# Altium PCB Routed BOARD 3.pcbdoc (part 7 of 7)
Units mil, origin at the board's own origin, x right, y up, seen from the top; angles counter-clockwise.
Board outline 6225 x 7025 mil, 8 copper layers (TopLayer, MidLayer1, MidLayer2, MidLayer3, MidLayer4, MidLayer5, MidLayer6, BottomLayer); 253 components, 548 nets, 2588 pads, 2014 vias.
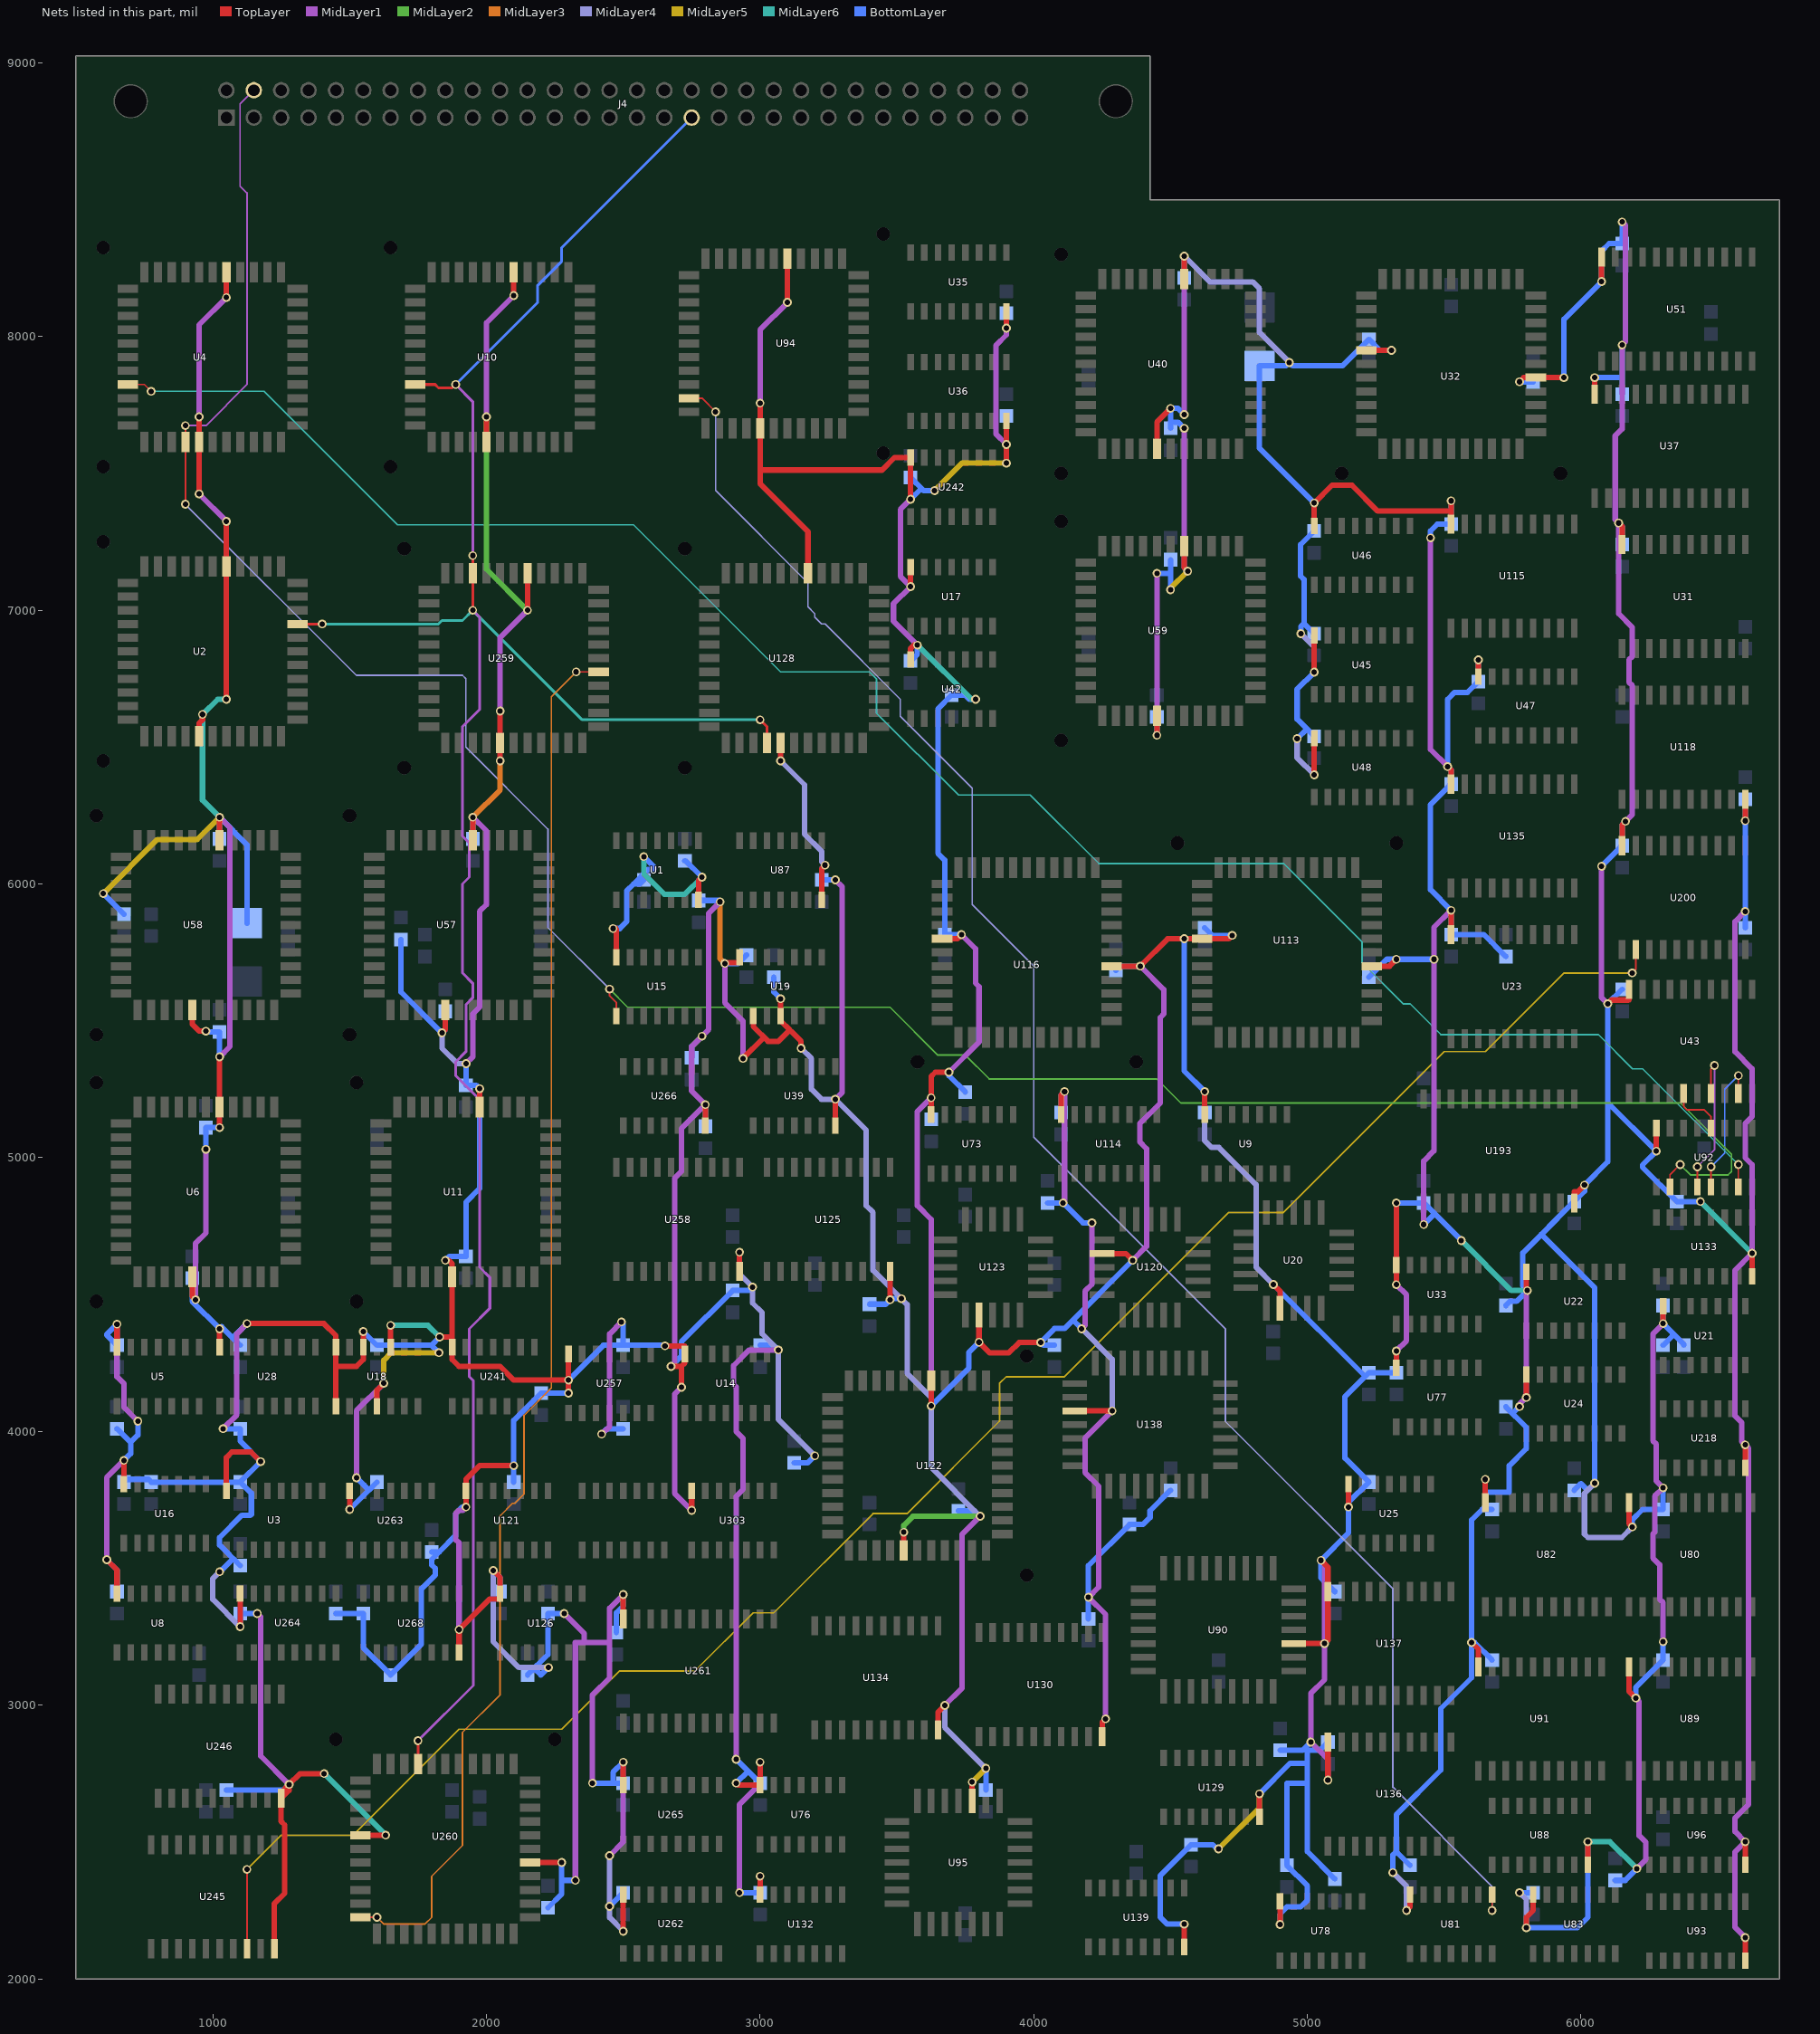
[diagram p13: the nets of this part, all layers, seen from the top]

## Via types
v1: diameter 32, hole 20, TopLayer to BottomLayer, 2014 vias

## Nets (pads, with @x,y where several pads share a name; then routed paths per layer and width w, separated by ;. In a path a pad name is that pad's centre, name@x,y a point inside that pad or via, vN(x,y) a via of type N, cw(c..) or ccw(c..) an arc to the next point about the centre after c; other vN are vias at no path point) (continued)
VDD: C18.1 C27.1 C28.1 C29.1 C38.1 C39.1 C45.1 C46.1 C48.1 C50.1 C51.1 C53.1 C55.1 C57.1 C59.1 C60.1 C61.1 C67.1 C70.1 C73.1 C79.1 C80.1 C83.1 C85.1 C88.1 C90.1 C104.1 C106.1 C112.1 C119.1 C123.1 C124.1 C126.1 C127.1 C128.1 C130.1 C134.1 C140.1 C141.1 C143.1 C161.1 C163.1 C164.1 C165.1 C166.1 C167.1 C168.1 C170.1 C173.1 C180.1 C181.1 C186.1 C189.1 C191.1 C192.1 C193.1 C195.2 C196.1 C197.1 C198.1 C202.1 C205.1 C212.1 C213.1 C214.1 C216.1 C223.1 C225.1 C232.1 C241.1 C242.1 C244.1 C249.1 C250.1 C253.1 C254.1 C258.1 C261.1 C262.1 C264.1 C266.1 C267.2 C274.1 C280.1 C282.1 C287.1 C288.1 C291.1 C299.1 R1.1 R3.1 R5.1 R6.1 R7.1 R15.1 R16.1 R20.1 R22.1 R23.1 R24.1 R25.1 R37.1 R43.1 R58.1 R60.1 R64.1 R86.1 R89.1 R91.1 R110.1 R113.1 R126.1 R129.1 R212.1 R213.1 R281.1 R284.1 R286.1 R287.1 R291.1 U1.14 U2.22 U2.44 U3.16 U4.22 U4.44 U5.14 U6.22 U6.44 U8.14 U9.14 U10.22 U10.44 U11.22 U11.44 U14.14 U15.14 U16.14 U17.14 U18.1 U18.4 U18.10 U18.12 U18.14 U19.2 U19.4 U19.14 U20.20 U21.14 U22.16 U23.20 U24.16 U25.14 U28.16 U31.20 U32.22 U32.44 U33.14 U35.16 U36.16 U37.24 U39.14 U40.22 U40.44 U42.14 U43.20 U45.16 U46.16 U47.16 U48.16 U51.24 U57.22 U57.44 U58.22 U58.44 U59.22 U59.44 U73.14 U76.14 U77.14 U78.14 U80.20 U81.14 U82.20 U83.14 U87.14 U88.16 U89.20 U90.32 U91.20 U92.16 U93.16 U94.22 U94.44 U95.28 U96.16 U113.22 U113.44 U114.16 U115.20 U116.22 U116.44 U118.20 U120.20 U121.14 U122.22 U122.44 U123.20 U125.20 U126.14 U128.22 U128.44 U129.16 U130.20 U132.14 U133.16 U134.20 U135.20 U136.20 U137.20 U138.32 U139.16 U193.24 U200.20 U218.14 U241.14 U242.14 U245.20 U246.20 U257.14 U258.20 U259.22 U259.44 U260.22 U260.44 U261.24 U262.16 U263.14 U264.16 U265.16 U266.14 U268.16 U303.14 | length 119215.7
  TopLayer w20: v1(612.5,3531.5) 650,3494 U8.14@650,3408 ; U16.14@675,3808 v1(675,3894) ; U6.44@925,4565 925,4493.5 v1(937.5,4481) ; U58.44@925,5540 925,5488 950.5,5462.5 v1(975,5462.5) ; U2.44@950,6540 950,6587.5 962.5,6600 v1(962.5,6619.5) ; v1(950,7425) U4.44@950,7615 v1(950,7707) ; U28.16@1025,4308 v1(1025,4375) ; v1(1025,5110) U6.22@1025,5185 v1(1025,5368.5) ; U3.16@1050,3783 1050,3905 1070,3925 1140,3925 v1(1175,3890) ; v1(1050,6675) U2.22@1050,7160 v1(1050,7325) ; v1(1050,8143) U4.22@1050,8235 ; v1(1125,4394) 1406,4394 1450,4350 U18.14@1450,4308 ; U245.20@1225,2110 1225,2275 1262.5,2312.5 1262.5,2562.5 1250,2575 U246.20@1250,2660 ; v1(1407,2750) 1319,2750 v1(1279,2710) ; U18.1@1450,4092 U18.14@1450,4308 ; v1(1500,3715) U263.14@1500,3783 ; U260.44@1540,2525 v1(1632,2525) ; v1(1550,4365) U18.12@1550,4308 1550,4262.5 1525,4237.5 1450,4237.5 U18.14@1450,4308 ; U18.10@1650,4308 v1(1650,4387.5) ; v1(1829,4345) 1875,4345 U241.14@1875,4308 ; v1(1850,4625) 1862.5,4625 1875,4612.5 U11.44@1875,4565 U241.14@1875,4308 ; U57.22@1950,6160 v1(1950,6244) ; U11.22@1975,5185 v1(1975,5252.5) ; v1(2050,6450) U259.44@2050,6515 v1(2050,6632) ; v1(2100,3875) 1975,3875 1925,3825 U121.14@1925,3783 ; v1(2100,8150) U10.22@2100,8235 ; U260.22@2160,2425 v1(2275,2425) ; v1(2300,4140) U257.14@2300,4283 ; v1(2462.5,5837.5) 2472.5,5837.5 2475,5835 U15.14@2475,5733 ; v1(2652.5,4312.5) 2725,4312.5 U14.14@2725,4283 ; v1(2712.5,4161.5) 2712.5,4237.5 ; v1(2750,3711.5) U303.14@2750,3783 ; U266.14@2800,5117 v1(2800,5194) ; v1(2912.5,2715) 2919.5,2708 U76.14@3000,2708 v1(3000,2792) ; v1(2937.5,5362.5) 3014.75,5439.75 2975,5479.5 ; U132.14@3000,2308 v1(3000,2375) ; v1(3000,7757) U94.22@3000,7665 ; v1(3075,5581) U19.4@3075,5517 ; v1(3075,6450) U128.44@3075,6515 ; v1(3100,8125) U94.44@3100,8285 ; v1(3150,5400) 3150,5425 U19.4@3075,5500 ; U128.22@3175,7135 3175,7287.5 3000,7462.5 U94.22@3000,7665 ; U87.14@3225,5942 3225,6056.5 v1(3237.5,6069) ; v1(3475,4481) U125.20@3475,4585 ; U122.22@3525,3565 v1(3525,3632) ; v1(3550,7406) U242.14@3550,7558 3491,7558 3445.5,7512.5 3000,7512.5 U94.22@3000,7665 ; v1(3625,5219) U73.14@3625,5158 3625,5297 3640.5,5312.5 v1(3690,5312.5) ; U116.22@3665,5800 3721,5800 v1(3736,5815) ; U95.28@3775,2650 v1(3775,2719) ; v1(3900,7537.5) U36.16@3900,7692 v1(3900,7606) ; v1(3900,8031) U35.16@3900,8092 ; v1(4025,4325) 3946.5,4325 3909,4287.5 3838.5,4287.5 v1(3800,4326) ; U130.20@4250,2885 4250,2937.5 v1(4262.5,2950) ; v1(4450,6543.5) U59.44@4450,6615 ; U40.44@4450,7590 4450,7687.5 v1(4500,7737.5) ; U139.16@4550,2117 v1(4550,2200) ; v1(4550,5800) U113.44@4615,5800 ; v1(4725,5812.5) 4712.5,5800 U113.44@4615,5800 ; v1(4900,2199) U78.14@4900,2283 ; v1(5025,6399) U48.16@5025,6533 ; v1(5075,2726) U136.20@5075,2865 ; U32.22@5215,7950 v1(5307,7950) ; U113.22@5235,5700 5300,5700 v1(5325,5725) ; U77.14@5325,4233 v1(5325,4294) ; v1(5325,4536.5) U33.14@5325,4608 v1(5325,4835) ; v1(5362.5,2250) 5375,2262.5 U81.14@5375,2308 ; v1(5525,7400) U115.20@5525,7315 5525,7362.5 5257,7362.5 5162.5,7457 5090,7457 v1(5025,7392) ; U47.16@5625,6758 v1(5625,6819) ; U82.20@5650,3740 v1(5650,3825) ; v1(5775,7835) 5790,7850 U32.44@5835,7850 v1(5937.5,7850) ; U22.16@5800,4583 5800,4519 v1(5804,4515) ; U193.24@5975,4835 5975,4875 5987.5,4875 v1(6012.5,4900) ; U37.24@6050,7790 v1(6050,7850) ; v1(6137.5,7319) 6150,7306.5 U31.20@6150,7240 ; v1(6300,4394) U21.14@6300,4458 ; U93.16@6600,2067 v1(6600,2151) ; v1(6600,6231) U118.20@6600,6310 ; U58.22@1025,6160 v1(1025,6244) ; U58.22@1025,6160 v1(1025,6244) ; U58.22@1025,6160 v1(1025,6244) ; U58.22@1025,6160 v1(1025,6244) ; U58.22@1025,6160 v1(1025,6244) ; U246.20@1250,2660 1250,2681 v1(1279,2710) ; U246.20@1250,2660 1279,2689 v1(1279,2710) ; 1600,4151 U18.4@1600,4092 1600,4151 ; 1600,4151 v1(1625,4176) 1600,4151 ; v1(1837.5,5456) 1850,5468.5 ; v1(1837.5,5456) 1850,5468.5 ; v1(1837.5,5456) 1850,5468.5 ; 1850,5468.5 U57.44@1850,5540 ; 1850,5468.5 U57.44@1850,5540 ; 1850,5468.5 U57.44@1850,5540 ; U241.14@1875,4308 1875,4262.5 1900,4237.5 2050,4237.5 2100,4187.5 v1(2300,4187.5) ; v1(1900,3276) U268.16@1900,3192 v1(1900,3276) ; v1(1900,3276) 2011.5,3387.5 2050,3387.5 U126.14@2050,3408 ; U121.14@1925,3783 v1(1925,3724) U121.14@1925,3783 ; U126.14@2050,3408 2050,3467 ; U126.14@2050,3408 2050,3467 ; 2050,3467 v1(2025,3492) 2050,3467 ; v1(2300,4187.5) U257.14@2300,4283 ; v1(2300,4187.5) U257.14@2300,4283 ; U261.24@2500,3315 v1(2500,3404) ; U261.24@2500,3315 v1(2500,3404) ; U261.24@2500,3315 v1(2500,3404) ; 2712.5,4237.5 2725,4250 ; 2712.5,4237.5 v1(2675,4237.5) 2712.5,4237.5 ; 2712.5,4237.5 2725,4250 ; 2712.5,4237.5 2725,4250 ; 2725,4250 U14.14@2725,4283 ; 2725,4250 U14.14@2725,4283 ; 2725,4250 U14.14@2725,4283 ; 2775,6012.5 U1.14@2775,5942 2775,6012.5 ; 2775,6012.5 v1(2787.5,6025) 2775,6012.5 ; v1@2873.5,5712.5 U19.14@2925,5712.5 ; v1@2873.5,5712.5 v1(2871,5710) v1@2873.5,5712.5 ; v1@2873.5,5712.5 U19.14@2925,5712.5 ; U19.14@2925,5712.5 U19.14@2925,5733 U19.14@2925,5712.5 ; 2975,5479.5 U19.2@2975,5517 2975,5479.5 ; 2975,5479.5 3029.5,5425 3067,5425 3108.5,5466.5 U19.4@3075,5500 ; U19.4@3075,5500 U19.4@3075,5517 ; U19.4@3075,5500 U19.4@3075,5517 ; U39.14@3275,5117 v1(3275,5213.5) ; U39.14@3275,5117 v1(3275,5213.5) ; U39.14@3275,5117 v1(3275,5213.5) ; 3550,6860.5 U42.14@3550,6820.5 3550,6860.5 ; 3550,6860.5 v1@3562.5,6873 ; 3550,6860.5 v1@3562.5,6873 ; v1@3562.5,6873 v1(3575,6873) v1@3562.5,6873 ; v1(3625,4093) U122.44@3625,4185 ; v1(3625,4093) U122.44@3625,4185 ; v1(3625,4093) U122.44@3625,4185 ; v1(3625,4093) U122.44@3625,4185 ; 3650,2974 U134.20@3650,2910 3650,2974 ; 3650,2974 v1(3675,2999) 3650,2974 ; v1(3800,4326) U123.20@3800,4425 v1(3800,4326) ; 4100,5229.5 v1(4112.5,5242) 4100,5229.5 ; 4100,5229.5 U114.16@4100,5158 4100,5229.5 ; U116.44@4285,5700 v1(4389.5,5700) ; U116.44@4285,5700 v1(4389.5,5700) ; U116.44@4285,5700 v1(4389.5,5700) ; 4336.5,4650 v1(4361.5,4625) 4336.5,4650 ; 4336.5,4650 U120.20@4250,4650 4336.5,4650 ; v1(4389.5,5700) 4489.5,5800 U113.44@4615,5800 ; 4550,7155.5 U59.22@4550,7235 4550,7155.5 ; 4550,7155.5 v1(4562.5,7143) 4550,7155.5 ; U40.22@4550,8210 v1(4550,8294) ; U40.22@4550,8210 v1(4550,8294) ; U40.22@4550,8210 v1(4550,8294) ; 4900,4512.5 U20.20@4900,4450 4900,4512.5 ; 4900,4512.5 v1(4875.5,4537) 4900,4512.5 ; U46.16@5025,7308 v1(5025,7392) ; U46.16@5025,7308 v1(5025,7392) ; U46.16@5025,7308 v1(5025,7392) ; v1(5062.5,3225) 5075,3237.5 U137.20@5075,3415 ; v1(5062.5,3225) U90.32@4950,3225 v1(5062.5,3225) ; U137.20@5075,3415 5075,3504 ; U137.20@5075,3415 5075,3504 ; 5075,3504 v1(5050,3529) 5075,3504 ; v1(5512.5,6429) 5525,6416.5 ; v1(5512.5,6429) 5525,6416.5 ; v1(5512.5,6429) 5525,6416.5 ; U23.20@5525,5815 v1(5525,5904) ; U23.20@5525,5815 v1(5525,5904) ; U23.20@5525,5815 v1(5525,5904) ; U135.20@5525,6365 5525,6416.5 ; U135.20@5525,6365 5525,6416.5 ; U135.20@5525,6365 5525,6416.5 ; 5625,3204 U91.20@5625,3140 5625,3204 ; 5625,3204 v1(5600,3229) 5625,3204 ; 5800,2225 5825,2250 ; 5800,2225 v1(5800,2186.5) 5800,2225 ; 5800,2225 5825,2250 ; 5825,2250 U83.14@5825,2308 5825,2250 ; 6150,6216.5 U200.20@6150,6140 6150,6216.5 ; 6150,6216.5 v1(6162.5,6229) 6150,6216.5 ; 6175,3051 v1(6200,3026) 6175,3051 ; 6175,3051 U89.20@6175,3140 6175,3051 ; 6175,3663.5 U80.20@6175,3740 6175,3663.5 ; 6175,3663.5 v1(6187.5,3651) 6175,3663.5 ; 6175,5577.5 U43.20@6175,5615 6175,5577.5 ; 6175,5577.5 6112.5,5577.5 v1(6097.5,5562.5) 6110,5575 6172.5,5575 6175,5577.5 ; U133.16@6625,4567 v1(6625,4651) ; U133.16@6625,4567 v1(6625,4651) ; U133.16@6625,4567 v1(6625,4651) ; U5.14@650,4308 v1(650,4392) U5.14@650,4308 ; v1(1100,3286.5) U264.16@1100,3408 v1(1100,3286.5) ; U10.44@2000,7615 v1(2000,7707) U10.44@2000,7615 ; v1(2150,7000) U259.22@2150,7135 v1(2150,7000) ; v1(2500,2174) U262.16@2500,2308 v1(2500,2174) ; U265.16@2500,2708 v1(2500,2792) U265.16@2500,2708 ; U258.20@2925,4585 v1(2925,4655) U258.20@2925,4585 ; v1(3550,7086.5) U17.14@3550,7158 v1(3550,7086.5) ; U138.32@4150,4075 v1(4286.5,4075) U138.32@4150,4075 ; U9.14@4625,5158 v1(4625,5242) U9.14@4625,5158 ; U129.16@4825,2592 v1(4825,2676) U129.16@4825,2592 ; v1(5025,6774) U45.16@5025,6908 v1(5025,6774) ; v1(5150,3724) U25.14@5150,3808 v1(5150,3724) ; v1(5800,4124) U24.16@5800,4208 v1(5800,4124) ; U88.16@6025,2417 v1(6025,2501) U88.16@6025,2417 ; v1(6075,8201) U51.24@6075,8290 v1(6075,8201) ; v1(6275,5024) U92.16@6275,5108 v1(6275,5024) ; U96.16@6600,2417 v1(6600,2501) U96.16@6600,2417 ; U218.14@6600,3867 v1(6600,3951) U218.14@6600,3867
  MidLayer1 w20: v1(612.5,3531.5) 612.5,3831.5 v1(675,3894) ; v1(650,4392) 650,4200 675,4175 675,4089 v1(726.5,4037.5) ; v1(937.5,4481) 937.5,4687.5 975,4725 v1(975,5031) ; v1(950,7425) v1(1050,7325) ; v1(950,7707) 950,8043 v1(1050,8143) ; v1(1025,5368.5) 1062.5,5406 1062.5,6206.5 v1(1025,6244) ; v1(1037.5,4010) 1087.5,4060 1087.5,4356.5 v1(1125,4394) ; v1(1162.5,3335) 1175,3322.5 1175,2814 v1(1279,2710) ; v1(1525,3831) 1525,4076 v1(1625,4176) ; v1(1900,3276) 1900,3593 1887.5,3605.5 1887.5,3700 1900,3712.5 1913.5,3712.5 v1(1925,3724) ; v1(1925.5,5344) 1950,5368.5 1950,5525 1975,5550 1975,5900 2000,5925 2000,6194 v1(1950,6244) ; v1(2000,7707) 2000,8050 v1(2100,8150) ; v1(2050,6632) 2050,6900 v1(2150,7000) ; v1(2284,3335) 2357.5,3261.5 2357.5,3229 2325,3229 ; v1(2387.5,2715) 2387.5,3037.5 2450,3100 2450,3354 ; v1(2421,3990) 2450,4019 2450,4356.5 v1(2493.5,4400) ; v1(2450,2450) 2500,2500 v1(2500,2792) ; v1(2675,4237.5) 2687.5,4250 2687.5,4925 2712.5,4950 2712.5,5106.5 v1(2800,5194) 2750,5244 2750,5406.5 v1(2787.5,5444) ; v1(2712.5,4161.5) 2687.5,4136.5 2687.5,3774 v1(2750,3711.5) ; v1(2871,5710) 2871,5566.5 2937.5,5500 v1(2937.5,5362.5) ; v1(2912.5,2802.5) 2912.5,3762.5 2937.5,3787.5 2937.5,3975 2912.5,4000 2912.5,4162.5 2903,4172 2903,4240.5 2960,4297.5 v1(3066.5,4297.5) ; v1(2925,2315) 2925,2637.5 3000,2712.5 v1(3000,2792) ; v1(3000,7757) 3000,8025 v1(3100,8125) ; v1(3275,5213.5) 3300,5238.5 3300,5990 v1(3275,6015) ; v1(3550,7406) 3512.5,7368.5 3512.5,7124 v1(3550,7086.5) 3487.5,7024 3487.5,6960.5 v1(3575,6873) ; v1(3625,4093) 3625,4775 3575,4825 3575,5169 v1(3625,5219) ; v1(3675,2999) 3737.5,3061.5 3737.5,3623.5 v1(3804,3690) ; v1(3690,5312.5) 3800,5422.5 3800,5625 3787.5,5637.5 3787.5,5763.5 v1(3736,5815) ; v1(3900,7606) 3862.5,7643.5 3862.5,7968.5 3900,8006 v1(3900,8031) ; v1(4107.5,4835) 4112.5,4840 v1(4112.5,5242) ; v1(4175,4375) 4187.5,4387.5 4187.5,4512.5 4212.5,4537.5 v1(4212.5,4762.5) ; v1(4262.5,2950) 4262.5,3331.5 v1(4200,3394) 4237.5,3431.5 4237.5,3800 4187.5,3850 4187.5,3976 v1(4286.5,4075) ; v1(4361.5,4625) 4412.5,4676 4412.5,5033 4387.5,5058 4387.5,5125 4462.5,5200 4462.5,5512.5 4475,5525 4475,5614.5 v1(4389.5,5700) ; v1(4450,6543.5) v1(4450,7135) ; v1(4550,7665) 4550,7155.5 v1(4562.5,7143) ; v1(4550,7715) v1(4550,8294) ; v1(5050,3529) 5062.5,3516.5 5062.5,3093 ; v1(5062.5,3225) 5062.5,3093 ; v1(5075,2726) 5075,2802.5 v1(5012.5,2865) ; v1(5325,4294) 5362.5,4331.5 5362.5,4499 v1(5325,4536.5) ; v1(5425,4756) 5425,4987.5 5462.5,5025 5462.5,5841.5 ; v1(5450,7265) 5450,6491.5 v1(5512.5,6429) ; v1(5462.5,5725) 5462.5,5841.5 ; v1(5775,4091) 5775,4099 v1(5800,4124) 5800,4511 v1(5804,4515) ; v1(6075,6065) 6075,5585 v1(6097.5,5562.5) ; v1(6150,8419) 6162.5,8406.5 6162.5,7981.5 v1(6150,7969) 6150,7662.5 6125,7637.5 6125,7331.5 v1(6137.5,7319) 6137.5,6987.5 6187.5,6937.5 6187.5,6831.5 6175,6819 6175,6737.5 6187.5,6725 6187.5,6254 v1(6162.5,6229) ; v1(6200,3026) 6212.5,3013.5 6212.5,2523.5 6236,2500 6236,2434.5 v1(6204,2402.5) ; v1(6300,3231.5) 6300,3375 6287.5,3387.5 6287.5,3512.5 6262.5,3537.5 6262.5,3625 6269.5,3632 6269.5,3763.5 v1(6300,3794) 6275,3819 6275,3953.5 6262.5,3966 6262.5,4356.5 v1(6300,4394) ; v1(6600,2151) 6562.5,2188.5 6562.5,2463.5 v1(6600,2501) 6562.5,2538.5 6562.5,2587.5 6612.5,2637.5 6612.5,3938.5 v1(6600,3951) 6587.5,3963.5 6587.5,4032 6562.5,4057 6562.5,4588.5 v1(6625,4651) 6625,4975 6600,5000 6600,5125 6625,5150 6625,5325 6562.5,5387.5 6562.5,5862.5 v1(6600,5900) ; 2325,3229 v1(2325,2360) 2325,3229 ; 2325,3229 2450,3229 2450,3354 ; 2450,3354 v1(2500,3404) 2450,3354 ; v1(2787.5,5444) 2812.5,5469 ; v1(2787.5,5444) 2812.5,5469 ; 2812.5,5469 2812.5,5893.5 ; 2812.5,5469 2812.5,5893.5 ; 2812.5,5893.5 v1(2854,5935) 2812.5,5893.5 ; v1(5012.5,2865) 5012.5,3043 ; v1(5012.5,2865) 5012.5,3043 ; 5012.5,3043 5062.5,3093 ; 5012.5,3043 5062.5,3093 ; 5462.5,5841.5 v1(5525,5904) 5462.5,5841.5
  MidLayer2 w20: v1(2000,7707) 2000,7150 v1(2150,7000) ; v1(3525,3632) 3525,3657 3558,3690 v1(3804,3690)
  MidLayer3 w20: v1(1950,6244) 2050,6344 v1(2050,6450) ; v1(2854,5935) 2854,5727 v1(2871,5710)
  MidLayer4 w20: v1(1025,3487.5) 1000,3462.5 1000,3386.5 v1(1100,3286.5) ; v1(1837.5,5456) 1837.5,5400 1893.5,5344 v1(1925.5,5344) ; v1(2025,3492) 2025,3231.5 2119,3137.5 v1(2226.5,3137.5) ; v1(2450,2265) 2450,2224 ; v1(2450,2450) 2450,2224 ; v1(3075,6450) 3162.5,6362.5 3162.5,6182 3225,6119.5 3225,6081.5 v1(3237.5,6069) ; v1(3150,5400) 3187.5,5362.5 3187.5,5250 3224,5213.5 v1(3275,5213.5) 3387.5,5101 3387.5,4825 3412.5,4800 3412.5,4589 v1(3516.5,4485) 3537.5,4464 3537.5,4212.5 3625,4125 v1(3625,4093) 3625,3869 v1(3804,3690) ; v1(3200,3911) 3066.5,4044.5 v1(3066.5,4297.5) 3007,4357 3007,4434.5 2972.5,4469 v1(2972.5,4527.5) ; v1(3675,2999) 3675,2919 v1(3825,2769) ; v1(4175,4375) 4286.5,4263.5 v1(4286.5,4075) ; v1(4550,8294) 4644,8200 4800,8200 4825,8175 4825,8014.5 v1(4934,7905.5) ; v1(4625,5242) 4625,5062.5 4650,5037.5 4677,5037.5 4812.5,4902 4812.5,4600 v1(4875.5,4537) ; v1(4962.5,6531) 4962.5,6461.5 v1(5025,6399) ; v1(4976,6915) 5025,6866 v1(5025,6774) ; v1(5312.5,2388.5) 5362.5,2338.5 v1(5362.5,2250) ; v1(5775,2315) 5800,2290 v1(5800,2186.5) ; v1(6050,3811) 6012.5,3773.5 6012.5,3625 6025,3612.5 6149,3612.5 v1(6187.5,3651) ; 2450,2224 v1(2500,2174) 2450,2224 ; 2925,4575 v1(2925,4655) 2925,4575 ; 2925,4575 v1(2972.5,4527.5) ; 2925,4575 v1(2972.5,4527.5)
  MidLayer5 w20: v1(600,5965) 797.5,6162.5 943.5,6162.5 v1(1025,6244) ; v1(1625,4176) 1625,4260 1652.5,4287.5 v1(1826.5,4287.5) ; v1(3637.5,7437.5) 3737.5,7537.5 v1(3900,7537.5) ; v1(3775,2719) v1(3825,2769) ; v1(4500,7075) 4500,7080.5 v1(4562.5,7143) ; v1(4675,2475) 4825,2625 v1(4825,2676)
  MidLayer6 w20: v1(1050,6675) 1018,6675 v1(962.5,6619.5) ; v1(1407,2750) v1(1632,2525) ; v1(1650,4387.5) 1786.5,4387.5 v1(1829,4345) ; v1(2575,6100) 2575,6037.5 2650,5962.5 2725,5962.5 v1(2787.5,6025) ; v1(3575,6873) 3773,6675 v1(3787.5,6675) ; v1(5562.5,4697.5) 5745,4515 v1(5804,4515) ; v1(6025,2501) 6105.5,2501 v1(6204,2402.5) ; v1(6436,4840) v1(6625,4651) ; 962.5,6306.5 v1(1025,6244) 962.5,6306.5 ; 962.5,6306.5 v1(962.5,6619.5) ; 962.5,6306.5 v1(962.5,6619.5)
  BottomLayer w20: v1(600,5965) R25.1@675,5890 ; C163.1@650,4315 612.5,4352.5 612.5,4354.5 v1(650,4392) ; v1(726.5,4037.5) 726.5,3986.5 700,3960 ; v1(975,5031) C261.1@975,5110 v1(1025,5110) ; v1(975,5462.5) 977.5,5460 C232.1@1025,5460 ; v1(1025,3487.5) 1027.5,3487.5 1075,3535 R1.1@1100,3510 1025,3585 1025,3612.5 1106.5,3694 1137.5,3694 1141,3697.5 1141,3774 C80.1@1100,3815 ; v1(1037.5,4010) R58.1@1100,4010 1100,3965 v1(1175,3890) ; v1(1100,3286.5) C288.1@1100,3335 v1(1162.5,3335) ; C267.2@1125,5857 1125,6144 v1(1025,6244) ; R281.1@1450,3335 C189.1@1550,3335 1550,3210 R291.1@1650,3110 1762.5,3222.5 1762.5,3425 1812.5,3475 1812.5,3500 1800,3512.5 1800,3532 1828,3560 ; v1(1500,3715) C141.1@1600,3815 1570.5,3785.5 v1(1525,3831) ; v1(1550,4365) C253.1@1600,4315 ; R24.1@1687.5,5797.5 1687.5,5606 v1(1837.5,5456) 1850,5468.5 C119.1@1850,5535 ; v1(1826.5,4287.5) 1799,4315 ; v1(1850,4625) 1865,4640 C67.1@1925,4640 1925,4837.5 1975,4887.5 v1(1975,5252.5) ; v1(1925,3724) 1911.5,3724 1887.5,3700 1887.5,3619.5 1828,3560 ; v1(2025,3492) 2050,3467 C27.1@2050,3415 ; v1(2100,3875) C216.1@2100,3815 2100,4040 C241.1@2200,4140 v1(2300,4140) ; v1(2226.5,3137.5) 2199,3110 2174.5,3134.5 R23.1@2150,3110 2225,3185 R129.1@2225,3335 v1(2284,3335) ; v1(2275,2425) 2275,2310 ; v1(2300,4187.5) 2427.5,4315 C165.1@2500,4315 ; v1(2387.5,2715) C191.1@2500,2715 2462.5,2715 2462.5,2754.5 v1(2500,2792) ; v1(2421,3990) 2441,4010 R287.1@2500,4010 ; v1(2450,2265) C164.1@2500,2315 ; v1(2462.5,5837.5) 2487.5,5837.5 2512.5,5862.5 2512.5,5975 2537.5,6000 ; C134.1@2475,3265 2475,3337.5 2500,3362.5 v1(2500,3404) ; v1(2493.5,4400) 2500,4393.5 C165.1@2500,4315 ; v1(2575,6100) 2612.5,6062.5 2612.5,6052.5 2590,6052.5 2537.5,6000 ; v1(2652.5,4312.5) 2650,4315 C165.1@2500,4315 ; v1(2675,4237.5) 2712.5,4275 2712.5,4327.5 C205.1@2900,4515 2960,4515 v1(2972.5,4527.5) ; R6.1@2725,6085 2727.5,6085 v1(2787.5,6025) ; v1(2854,5935) 2849,5940 C18.1@2775,5940 ; v1(2912.5,2715) 2956.25,2758.75 C291.1@3000,2715 v1(2912.5,2802.5) ; v1(2925,2315) C287.1@3000,2315 v1(3000,2375) ; R60.1@3050,5660 3050,5606 v1(3075,5581) ; R22.1@3125,3885 3174,3885 v1(3200,3911) ; v1(3275,6015) C282.1@3225,6015 ; v1(3475,4481) 3459,4465 ; v1(3625,4093) 3762.5,4230.5 3762.5,4288.5 v1(3800,4326) ; v1(3637.5,7437.5) 3597.5,7437.5 C262.1@3550,7485 ; v1(3787.5,6675) 3764,6675 3749,6690 R64.1@3700,6690 3650,6640 3650,6112.5 3675,6087.5 C198.1@3675,5815 ; C192.1@4100,5165 4100,5229.5 v1(4112.5,5242) ; v1(4212.5,4762.5) 4180,4762.5 v1(4107.5,4835) ; C242.1@4300,5685 4315,5700 v1(4389.5,5700) ; v1(4361.5,4625) 4112.5,4376 ; v1(4450,7135) 4500,7135 C161.1@4500,7185 v1(4500,7075) ; R126.1@4500,3785 4425,3710 4425,3686 4399,3660 R113.1@4350,3660 4200,3510 C57.1@4200,3315 ; v1(4550,2200) 4487.5,2200 4462.5,2225 4462.5,2377.5 R86.1@4575,2490 4654,2490 4669,2475 v1(4675,2475) ; v1(4550,5800) 4550,5317 v1(4625,5242) ; v1(4550,7665) 4527.5,7687.5 4500,7687.5 C60.1@4500,7665 ; v1(4550,7715) 4527.5,7737.5 v1(4500,7737.5) ; C274.1@4550,8215 v1(4550,8294) ; C39.1@4625,5840 4652.5,5812.5 v1(4725,5812.5) ; v1(4825,2676) 4936.5,2787.5 5000,2787.5 5000,2835 ; v1(4875.5,4537) 5211.25,4201.25 C51.1@5225,4215 ; v1(4900,2199) 4900,2237.5 4925,2262.5 4975,2262.5 5000,2287.5 5000,2340 C50.1@4925,2415 4925,2715 5000,2715 5000,2835 ; C88.1@4900,2835 4982.5,2835 v1(5012.5,2865) ; v1(4962.5,6531) 4998.25,6566.75 C280.1@5025,6540 4962.5,6602.5 4962.5,6711.5 v1(5025,6774) ; v1(4976,6915) 4976,6941 4987.5,6952.5 ; R89.1@5100,2365 5000,2465 5000,2835 ; v1(5307,7950) 5265,7950 C170.1@5225,7990 5128,7893 4946.5,7893 v1(4934,7905.5) ; v1(5312.5,2388.5) 5312.5,2452.5 5325,2465 ; v1(5325,4835) R213.1@5425,4835 ; v1(5325,5725) 5290,5725 ; v1(5425,4756) 5464.5,4795.5 R213.1@5425,4835 ; v1(5450,7265) 5450,7290 5475,7315 C46.1@5525,7315 v1(5525,7400) ; v1(5462.5,5725) 5290,5725 ; v1(5562.5,4697.5) R213.1@5425,4835 ; v1(5625,6819) C83.1@5625,6740 5585,6700 5537.5,6700 5512.5,6675 v1(5512.5,6429) 5525,6416.5 C223.1@5525,6365 5450,6290 5450,5979 v1(5525,5904) ; v1(5650,3825) C90.1@5650,3726.5 ; R20.1@5725,5735 5645,5815 C112.1@5525,5815 ; v1(5775,2315) C264.1@5825,2315 ; v1(5775,4091) 5749.5,4065.5 C53.1@5725,4090 5800,4015 5800,3937.5 5737.5,3875 5737.5,3777.5 5650,3777.5 C90.1@5650,3726.5 ; v1(5775,7835) C180.1@5825,7835 ; v1(5800,2186.5) 5986.5,2186.5 6025,2225 v1(6025,2501) ; v1(5937.5,7850) 5937.5,8063.5 v1(6075,8201) 6075,8312.5 6102.5,8340 C104.1@6150,8340 v1(6150,8419) ; v1(6050,7850) 6150,7850 C254.1@6150,7790 ; v1(6075,6065) C225.1@6150,6140 6150,6216.5 v1(6162.5,6229) ; v1(6187.5,3651) 6187.5,3677.5 6225,3715 C186.1@6300,3715 ; v1(6200,3026) 6200,3065 C213.1@6300,3165 v1(6300,3231.5) ; R15.1@6300,4315 6335,4350 6335,4359 v1(6300,4394) ; R16.1@6375,4315 6375,4319 v1(6300,4394) ; v1(6436,4840) C85.1@6350,4840 6225,4965 6225,4974 v1(6275,5024) 6097.5,5201.5 v1(6097.5,5562.5) ; v1(6600,5900) R212.1@6600,5840 C258.1@6600,6310 v1(6600,6231) ; 650,3494 v1(612.5,3531.5) 650,3494 ; 650,3494 C244.1@650,3415 650,3494 ; C45.1@675,3815 v1(675,3894) ; C45.1@675,3815 v1(675,3894) ; C45.1@675,3815 675,3825 765,3825 R3.1@775,3815 C80.1@1100,3815 ; C45.1@675,3815 v1(675,3894) ; v1(675,3894) 700,3919 700,3960 ; 700,3960 R5.1@650,4010 700,3960 ; 925,4493.5 C168.1@925,4560 ; 925,4493.5 v1(937.5,4481) 925,4493.5 ; 925,4493.5 C168.1@925,4560 ; C168.1@925,4560 925,4475 v1(1025,4375) ; v1(1025,4375) v1@1032.5,4382.5 ; v1(1025,4375) v1@1032.5,4382.5 ; C232.1@1025,5460 v1(1025,5368.5) C232.1@1025,5460 ; v1(1025,6244) C128.1@1025,6165 v1(1025,6244) ; v1@1032.5,4382.5 C140.1@1100,4315 ; v1@1032.5,4382.5 C140.1@1100,4315 ; 1073,4342 v1(1125,4394) 1073,4342 ; 1073,4342 C140.1@1100,4315 ; 1073,4342 C140.1@1100,4315 ; C80.1@1100,3815 v1(1175,3890) ; C80.1@1100,3815 v1(1175,3890) ; 1259,2690 v1(1279,2710) 1259,2690 ; 1259,2690 C202.1@1050,2690 1259,2690 ; C253.1@1600,4315 1799,4315 ; C253.1@1600,4315 1799,4315 ; C253.1@1600,4315 1799,4315 ; 1799,4315 v1(1829,4345) 1799,4315 ; 1828,3560 R286.1@1800,3560 1828,3560 ; C126.1@1925,5265 1962.5,5265 ; C126.1@1925,5265 1962.5,5265 ; C126.1@1925,5265 v1@1925,5343.5 ; C126.1@1925,5265 v1@1925,5343.5 ; v1@1925,5343.5 v1(1925.5,5344) v1@1925,5343.5 ; C249.1@1950,6165 v1(1950,6244) ; C249.1@1950,6165 v1(1950,6244) ; C249.1@1950,6165 v1(1950,6244) ; 1962.5,5265 v1(1975,5252.5) ; 1962.5,5265 v1(1975,5252.5) ; C79.1@2225,2260 2275,2310 ; C79.1@2225,2260 2275,2310 ; C79.1@2225,2260 2275,2310 ; 2275,2310 2275,2360 ; 2275,2310 2275,2360 ; 2275,2360 v1(2325,2360) 2275,2360 ; 2537.5,6000 R7.1@2560,6000 ; 2537.5,6000 R7.1@2560,6000 ; R7.1@2560,6000 R7.1@2575,6015 R7.1@2560,6000 ; R284.1@2750,5365 2750,5406.5 ; R284.1@2750,5365 2750,5406.5 ; R284.1@2750,5365 2750,5406.5 ; 2750,5406.5 v1(2787.5,5444) ; 2750,5406.5 v1(2787.5,5444) ; 2750,5406.5 v1(2787.5,5444) ; C18.1@2775,5940 2775,6012.5 ; C18.1@2775,5940 2775,6012.5 ; 2775,6012.5 v1(2787.5,6025) ; 2775,6012.5 v1(2787.5,6025) ; C167.1@2800,5115 v1(2800,5194) ; C167.1@2800,5115 v1(2800,5194) ; C167.1@2800,5115 v1(2800,5194) ; 2920,5710 v1(2871,5710) 2920,5710 ; 2920,5710 C193.1@2950,5740 2920,5710 ; C28.1@3000,4315 3049,4315 ; C28.1@3000,4315 3049,4315 ; C28.1@3000,4315 3049,4315 ; 3049,4315 v1(3066.5,4297.5) ; 3049,4315 v1(3066.5,4297.5) ; 3049,4315 v1(3066.5,4297.5) ; C282.1@3225,6015 3225,6056.5 ; C282.1@3225,6015 3225,6056.5 ; 3225,6056.5 v1(3237.5,6069) 3225,6056.5 ; C29.1@3400,4465 3459,4465 ; C29.1@3400,4465 3459,4465 ; C29.1@3400,4465 3459,4465 ; 3459,4465 v1@3479,4485 ; 3459,4465 v1@3479,4485 ; v1@3479,4485 v1(3516.5,4485) v1@3479,4485 ; C262.1@3550,7485 3589.5,7445.5 ; C262.1@3550,7485 3589.5,7445.5 ; 3575,6840 C130.1@3550,6815 3575,6840 ; 3575,6840 v1(3575,6873) 3575,6840 ; 3589.5,7445.5 v1(3550,7406) 3589.5,7445.5 ; C198.1@3675,5815 v1(3736,5815) C198.1@3675,5815 ; v1@3690,5300 v1(3690,5312.5) v1@3690,5300 ; v1@3690,5300 R43.1@3750,5240 v1@3690,5300 ; C59.1@3725,3710 3784,3710 ; C59.1@3725,3710 3784,3710 ; C59.1@3725,3710 3784,3710 ; 3784,3710 v1(3804,3690) ; 3784,3710 v1(3804,3690) ; 3784,3710 v1(3804,3690) ; v1(4025,4325) v1@4035,4315 ; v1(4025,4325) 4076,4376 ; v1(4025,4325) 4076,4376 ; v1(4025,4325) v1@4035,4315 ; v1(4025,4325) v1@4035,4315 ; v1(4025,4325) 4076,4376 ; v1(4025,4325) v1@4035,4315 ; v1@4035,4315 C250.1@4075,4315 ; v1@4035,4315 C250.1@4075,4315 ; v1@4035,4315 C250.1@4075,4315 ; v1@4035,4315 C250.1@4075,4315 ; 4076,4376 4112.5,4376 ; 4076,4376 4112.5,4376 ; 4076,4376 4112.5,4376 ; v1(4107.5,4835) R110.1@4050,4835 v1(4107.5,4835) ; 4112.5,4376 4143.25,4406.75 ; 4112.5,4376 4143.25,4406.75 ; 4143.25,4406.75 v1(4175,4375) 4143.25,4406.75 ; C57.1@4200,3315 v1(4200,3394) C57.1@4200,3315 ; C60.1@4500,7665 v1(4500,7737.5) ; C60.1@4500,7665 v1(4500,7737.5) ; v1(4625,5242) C48.1@4625,5165 v1(4625,5242) ; C195.2@4825,7893 4921.5,7893 ; C195.2@4825,7893 4825,7592 v1(5025,7392) C266.1@5025,7290 4975,7240 4975,7125 4987.5,7112.5 4987.5,6952.5 ; C195.2@4825,7893 4921.5,7893 ; 4921.5,7893 v1(4934,7905.5) ; 4921.5,7893 v1(4934,7905.5) ; 4987.5,6952.5 C38.1@5025,6915 4987.5,6952.5 ; 5000,2835 5045,2835 ; 5000,2835 5045,2835 ; 5000,2835 5045,2835 ; v1(5012.5,2865) 5043.75,2833.75 ; v1(5012.5,2865) 5043.75,2833.75 ; 5043.75,2833.75 C143.1@5075,2865 ; 5043.75,2833.75 C143.1@5075,2865 ; 5045,2835 C143.1@5075,2865 ; 5045,2835 C143.1@5075,2865 ; 5045,2835 C143.1@5075,2865 ; 5050,3465 C166.1@5100,3415 5050,3465 ; 5050,3465 v1(5050,3529) ; 5050,3465 v1(5050,3529) ; v1(5050,3529) 5150,3629 v1(5150,3724) 5150,3740 C106.1@5225,3815 5137.5,3902.5 5137.5,4127.5 C51.1@5225,4215 ; C51.1@5225,4215 R91.1@5325,4215 ; 5290,5725 C70.1@5225,5660 5290,5725 ; 5325,2465 C196.1@5375,2415 5325,2465 ; 5325,2465 5325,2600 5487.5,2762.5 5487.5,2987.5 5600,3100 v1(5600,3229) ; R91.1@5325,4215 v1(5325,4294) R91.1@5325,4215 ; C112.1@5525,5815 v1(5525,5904) ; C112.1@5525,5815 v1(5525,5904) ; v1(5600,3229) 5600,3676.5 5638.5,3715 ; v1(5600,3229) v1@5611,3229 ; v1(5600,3229) v1@5611,3229 ; v1@5611,3229 C214.1@5675,3165 v1@5611,3229 ; 5638.5,3715 C90.1@5650,3726.5 ; 5638.5,3715 C90.1@5675,3715 ; 5638.5,3715 C90.1@5675,3715 ; 5638.5,3715 C90.1@5675,3715 ; 5638.5,3715 C90.1@5650,3726.5 ; C212.1@5725,4460 C212.1@5740,4475 ; C212.1@5725,4460 C212.1@5740,4475 ; C212.1@5725,4460 C212.1@5740,4475 ; C212.1@5725,4460 C212.1@5740,4475 ; C212.1@5740,4475 5764,4475 ; C212.1@5740,4475 5764,4475 ; C212.1@5740,4475 5764,4475 ; C212.1@5740,4475 5764,4475 ; 5764,4475 v1(5804,4515) ; 5764,4475 v1(5804,4515) ; 5764,4475 v1(5804,4515) ; 5764,4475 v1(5804,4515) ; v1(5804,4515) 5787.5,4531.5 5787.5,4652.5 C181.1@5975,4840 ; C181.1@5975,4840 6012.5,4877.5 ; C181.1@5975,4840 6012.5,4877.5 ; C181.1@5975,4840 5855,4720 6050,4525 v1(6050,3811) ; R37.1@5999.5,3809.5 6024,3785 ; R37.1@5999.5,3809.5 R37.1@5975,3785 R37.1@5999.5,3809.5 ; R37.1@5999.5,3809.5 6024,3785 ; 6012.5,4877.5 v1(6012.5,4900) ; 6012.5,4877.5 v1(6012.5,4900) ; v1(6012.5,4900) 6097.5,4985 v1(6097.5,5562.5) ; 6024,3785 v1(6050,3811) ; 6024,3785 v1(6050,3811) ; v1(6097.5,5562.5) C73.1@6150,5615 ; v1(6097.5,5562.5) C73.1@6150,5615 ; v1(6097.5,5562.5) C73.1@6150,5615 ; v1(6137.5,7319) 6150,7306.5 ; v1(6137.5,7319) 6150,7306.5 ; v1(6137.5,7319) 6150,7306.5 ; C173.1@6150,7240 6150,7306.5 ; C173.1@6150,7240 6150,7306.5 ; C173.1@6150,7240 6150,7306.5 ; C254.1@6150,7790 v1(6150,7969) C254.1@6150,7790 ; 6161.5,2360 v1(6204,2402.5) 6161.5,2360 ; 6161.5,2360 C61.1@6125,2360 6161.5,2360 ; C186.1@6300,3715 v1(6300,3794) C186.1@6300,3715 ; v1(6300,4394) C299.1@6300,4460 ; v1(6300,4394) C299.1@6300,4460 ; v1(6300,4394) C299.1@6300,4460 ; v1(6300,4394) C299.1@6300,4460 ; C55.1@3625,5140 v1(3625,5219) C55.1@3625,5140 ; C197.1@3825,2690 v1(3825,2769) C197.1@3825,2690 ; v1(3900,7606) C124.1@3900,7710 v1(3900,7606) ; v1(3900,8031) C123.1@3900,8085 v1(3900,8031) ; v1(4450,6543.5) C127.1@4450,6610 v1(4450,6543.5)
  other v1: 2500,2174 5800,2186.5 2325,2360 6204,2402.5 6025,2501 6600,2501 4825,2676 1279,2710 3825,2769 2500,2792 3675,2999 6200,3026 5600,3229 1100,3286.5 4200,3394 2500,3404 2500,3404 2025,3492 5050,3529 612.5,3531.5 6187.5,3651 3804,3690 3804,3690 1925,3724 5150,3724 6300,3794 675,3894 6600,3951 4286.5,4075 3625,4093 3625,4093 3625,4093 5800,4124 1625,4176 2675,4237.5 5325,4294 3066.5,4297.5 3066.5,4297.5 1829,4345 4175,4375 650,4392 1125,4394 6300,4394 937.5,4481 3516.5,4485 5804,4515 5804,4515 4875.5,4537 4361.5,4625 6625,4651 6625,4651 2925,4655 6275,5024 2800,5194 2800,5194 3275,5213.5 3275,5213.5 3625,5219 4112.5,5242 4625,5242 3690,5312.5 1925.5,5344 1025,5368.5 2787.5,5444 2787.5,5444 1837.5,5456 1837.5,5456 6097.5,5562.5 4389.5,5700 2871,5710 2871,5710 3736,5815 5525,5904 5525,5904 2854,5935 2787.5,6025 3237.5,6069 6162.5,6229 1025,6244 1025,6244 1025,6244 1025,6244 1025,6244 1950,6244 1950,6244 5512.5,6429 5512.5,6429 4450,6543.5 5025,6774 3575,6873 3575,6873 2150,7000 3550,7086.5 4562.5,7143 6137.5,7319 6137.5,7319 5025,7392 3550,7406 3900,7606 2000,7707 6150,7969 3900,8031 6075,8201 4550,8294 4550,8294
VDD1: J4.35 U2.14 U10.36 U128.43 U259.26 U260.36 | length 9226.5
  TopLayer w10: U2.14@1310,6950 v1(1400,6950) ; U260.36@1750,2785 v1(1750,2870) ; v1(1950,7200) U259.26@1950,7135 ; v1(3000,6600) 3025,6575 U128.43@3025,6515 ; 1812.5,7825 U10.36@1740,7825 1812.5,7825 ; 1812.5,7825 1825,7812.5 ; 1812.5,7825 1825,7812.5 ; 1825,7812.5 1875,7812.5 ; 1825,7812.5 1875,7812.5 ; 1875,7812.5 v1(1887.5,7825) 1875,7812.5 ; v1(1950,7000) U259.26@1950,7135 ; v1(1950,7000) U259.26@1950,7135 ; v1(1950,7000) U259.26@1950,7135
  MidLayer1 w10: v1(1750,2870) 1952,3072 1952,4185.5 1937.5,4200 1937.5,4375 2012.5,4450 2012.5,4562.5 1975,4600 1975,5212.5 1887.5,5300 1887.5,5350 1925,5387.5 1925,5559 1950,5584 1950,5637.5 1912.5,5675 1912.5,6000 1937.5,6025 1937.5,6150 1912.5,6175 1912.5,6575 1975,6637.5 1975,6975 v1(1950,7000) ; v1(1887.5,7825) 1950,7762.5 v1(1950,7200)
  MidLayer6 w10: v1(1400,6950) 1825,6950 1837.5,6962.5 1912.5,6962.5 v1(1950,7000) 2350,6600 v1(3000,6600)
  BottomLayer w10: v1(1887.5,7825) 2187.5,8125 2187.5,8187.5 2275,8275 2275,8325 J4.35@2750,8800
  other v1: 1950,7000 1950,7000 1887.5,7825
XB0: U43.9 U92.5 | length 513.4
  TopLayer w6: U92.5@6475,4893 v1(6475,4967) ; U43.9@6575,5235 v1(6575,5300)
  BottomLayer w6: v1(6475,4967) 6525,5017 6525,5250 v1(6575,5300)
XB1: U43.7 U92.4 | length 578.1
  TopLayer w6: U92.4@6425,4893 v1(6425,4967) ; U43.7@6475,5235 6475,5325 v1(6487.5,5337.5)
  MidLayer1 w6: v1(6425,4967) 6487.5,5029.5 v1(6487.5,5337.5)
XISP: U43.5 U92.12 | length 205
  TopLayer w6: U43.5@6375,5235 6375,5187.5 6387.5,5175 6450,5175 6475,5150 U92.12@6475,5108
XMTCRC: U259.11 U260.6 | length 5136.1
  TopLayer w6: U260.6@1540,2225 v1(1600,2225) ; v1(2328,6775) U259.11@2410,6775
  MidLayer3 w6: v1(1600,2225) 1625,2200 1775,2200 1800,2225 1800,2375 1912.5,2487.5 1912.5,2900 2050,3037.5 2050,3692 2095.5,3737.5 2103.5,3737.5 2137.5,3771.5 2137.5,4059 2237.5,4159 2237.5,6684.5 v1(2328,6775)
XSTXPWR: U200.2 U245.18 | length 6879.5
  TopLayer w6: U245.18@1125,2110 v1(1125,2400) ; v1(6187,5675) 6200,5688 U200.2@6200,5760
  MidLayer5 w6: v1(1125,2400) 1250,2525 1512.5,2525 1900,2912.5 2275,2912.5 2487.5,3125 2762.5,3125 2975,3337.5 3050,3337.5 3412.5,3700 3537.5,3700 3875,4037.5 3875,4175 3900,4200 4112.5,4200 4712.5,4800 4912.5,4800 5500,5387.5 5650,5387.5 5937.5,5675 v1(6187,5675)
XT0: U4.36 U92.7 | length 7264.7
  TopLayer w6: U4.36@690,7825 750,7825 v1(775,7800) ; U92.7@6575,4893 v1(6575,4975)
  MidLayer6 w6: v1(775,7800) 1187.5,7800 1675,7312.5 2537.5,7312.5 3075,6775 3400,6775 3425,6750 3425,6625 3725,6325 3987.5,6325 4237.5,6075 4912.5,6075 5200,5787.5 5200,5712.5 5350,5562.5 5375,5562.5 5487.5,5450 6063,5450 6188,5325 6225,5325 v1(6575,4975)
XT1: J4.4 U4.43 U15.1 U92.2 | length 9258.4
  TopLayer w6: v1(900,7387.5) U4.43@900,7615 v1(900,7675) ; U92.2@6325,4893 6325,4938 v1(6362,4975) ; 2450,5591 2475,5566 ; 2450,5591 v1(2450,5616) 2450,5591 ; 2450,5591 2475,5566 ; 2475,5566 U15.1@2475,5517 2475,5566
  MidLayer1 w6: v1(900,7675) 975,7675 1125,7825 1125,8525 1100,8550 1100,8850 J4.4@1150,8900
  MidLayer2 w6: v1(2450,5616) 2516,5550 3475,5550 3650,5375 3750,5375 3837.5,5287.5 4450,5287.5 4537.5,5200 6362.5,5200 6550,5012.5 6550,4950 6537.5,4937.5 6399.5,4937.5 v1(6362,4975)
  MidLayer4 w6: v1(900,7387.5) 1525,6762.5 1912.5,6762.5 1925,6750 1925,6500 2225,6200 2225,5841 v1(2450,5616)
  other v1: 2450,5616
ZERO: U81.8 U94.16 | length 6833.9
  TopLayer w6: U94.16@2740,7775 2787.5,7775 v1(2837.5,7725) ; v1(5675,2250) U81.8@5675,2308
  MidLayer4 w6: v1(2837.5,7725) 2837.5,7437.5 3175,7100 3175,7012.5 3200,6987.5 3200,6975 3225,6950 3237.5,6950 3512.5,6675 3512.5,6612.5 3775,6350 3775,5925 4000,5700 4000,5075 4700,4375 4700,4037.5 5312.5,3425 5312.5,2700 5675,2337.5 v1(5675,2250)
pads on no net: J4.2 J4.3 J4.7 J4.8 J4.11 J4.14 J4.15 J4.19 J4.27 J4.34 J4.36 J4.43 J4.47 J4.51 J4.55 J4.56 J4.59 J4.60 J4.61 J4.62 U1.6 U2.6 U2.7 U2.8 U2.10 U2.15 U2.16 U2.18 U2.19 U2.20 U2.21 U2.25 U2.26 U2.40 U2.45 U2.46 U4.5 U4.7 U4.8 U4.9 U4.19 U4.30 U4.31 U4.32 U4.38 U4.39 U4.41 U4.42 U4.45 U4.46 U5.5 U5.6 U5.8 U5.9 U6.3 U6.6 U6.14 U6.16 U6.17 U6.21 U6.26 U6.27 U6.28 U6.29 U6.30 U6.31 U6.32 U6.38 U6.39 U6.41 U6.42 U6.43 U6.45 U6.46 U8.3 U8.4 U8.5 U8.6 U9.11 U9.13 U10.15 U10.24 U10.27 U10.28 U10.29 U10.37 U10.38 U10.39 U10.40 U10.41 U10.42 U10.43 U10.45 U10.46 U11.4 U11.9 U11.14 U11.17 U11.20 U11.21 U11.24 U11.25 U11.28 U11.30 U11.31 U11.36 U11.37 U11.39 U11.40 U11.41 U11.42 U11.43 U11.45 U11.46 U16.4 U16.6 U16.8 U16.13 U17.11 U17.12 U17.13 U18.9 U19.6 U19.8 U19.9 U19.13 U20.3 U20.4 U20.5 U20.6 U20.7 U20.8 U20.9 U20.16 U20.17 U20.18 U20.19 U21.5 U21.9 U22.9 U23.7 U24.11 U24.13 U24.15 U25.6 U25.9 U28.3 U28.6 U28.11 U28.14 U32.2 U32.3 U32.4 U32.6 U32.7 U32.8 U32.9 U32.14 U32.15 U32.16 U32.24 U32.27 U32.28 U32.29 U32.30 U32.31 U32.36 U32.38 U32.39 U32.40 U32.41 U32.42 U32.45 U32.46 U33.9 U33.10 U36.7 U36.10 U36.15 U37.1 U39.3 U40.9 U40.14 U40.15 U40.21 U40.24 U40.25 U40.26 U40.27 U40.28 U40.29 U40.30 U40.31 U40.36 U40.38 U40.39 U40.45 U40.46 U42.11 U43.19 U45.2 U45.5 U45.7 U45.9 U45.10 U45.12 U45.15 U46.2 U46.5 U46.7 U46.9 U46.10 U46.12 U46.15 U47.2 U47.5 U51.13 U57.7 U57.8 U57.9 U57.10 U57.15 U57.16 U57.17 U57.18 U57.24 U57.25 U57.26 U57.27 U57.28 U57.29 U57.30 U57.32 U57.36 U57.37 U57.38 U57.39 U57.40 U57.41 U57.42 U57.43 U57.45 U57.46 U58.2 U58.3 U58.4 U58.5 U58.7 U58.8 U58.16 U58.20 U58.21 U58.26 U58.27 U58.28 U58.29 U58.30 U58.31 U58.36 U58.37 U58.40 U58.45 U58.46 U59.2 U59.3 U59.4 U59.5 U59.7 U59.8 U59.24 U59.26 U59.27 U59.28 U59.29 U59.30 U59.31 U59.36 U59.37 U59.39 U59.40 U59.41 U59.42 U59.45 U59.46 U73.3 U73.6 U73.9 U76.4 U76.8 U77.1 U77.6 U77.8 U78.6 U78.8 U81.10 U83.1 U83.8 U83.13 U88.11 U88.12 U88.13 U88.14 U90.1 U90.12 U90.15 U90.17 U90.23 U90.27 U92.3 U92.11 U92.13 U92.14 U92.15 U93.11 U93.12 U93.13 U93.14 U94.14 U94.17 U94.18 U94.20 U94.25 U94.29 U94.32 U94.37 U94.38 U94.39 U94.40 U94.45 U94.46 U95.1 U95.8 U95.13 U95.15 U95.16 U95.17 U95.18 U95.19 U95.20 U95.22 U96.11 U96.12 U96.13 U96.14 U96.15 U113.16 U113.30 U113.31 U113.37 U113.40 U113.45 U113.46 U114.15 U116.2 U116.8 U116.11 U116.14 U116.30 U116.31 U116.37 U116.38 U116.42 U116.45 U116.46 U118.11 U118.12 U118.13 U118.14 U120.2 U120.6 U120.7 U120.8 U120.9 U120.12 U120.13 U120.14 U120.15 U120.16 U120.17 U120.19 U121.8 U121.9 U121.10 U121.11 U121.12 U121.13 U122.3 U122.7 U122.9 U122.14 U122.15 U122.16 U122.17 U122.18 U122.19 U122.20 U122.24 U122.26 U122.27 U122.28 U122.30 U122.31 U122.43 U122.45 U122.46 U123.1 U123.6 U123.11 U123.16 U126.6 U126.8 U128.4 U128.5 U128.6 U128.26 U128.30 U128.31 U128.32 U128.36 U128.37 U128.38 U128.39 U128.40 U128.42 U128.45 U128.46 U132.6 U132.8 U133.15 U134.12 U134.13 U134.14 U134.15 U135.1 U135.2 U135.4 U135.6 U135.8 U135.12 U135.14 U135.18 U138.1 U138.8 U138.12 U138.15 U138.17 U138.23 U138.25 U138.27 U193.3 U193.4 U193.5 U193.6 U193.7 U193.8 U193.9 U193.10 U193.11 U193.13 U193.15 U193.16 U193.17 U193.19 U193.20 U193.21 U193.22 U200.11 U200.12 U200.13 U200.14 U200.15 U200.16 U200.17 U200.18 U218.1 U218.3 U218.5 U218.8 U218.11 U218.13 U241.5 U241.6 U241.8 U241.10 U241.11 U241.12 U241.13 U242.10 U245.2 U245.3 U245.4 U245.5 U245.6 U245.7 U245.8 U245.9 U245.17 U246.2 U246.3 U246.4 U246.5 U246.6 U246.7 U246.8 U246.11 U257.6 U257.8 U259.3 U259.4 U259.5 U259.6 U259.7 U259.8 U259.9 U259.14 U259.15 U259.16 U259.17 U259.18 U259.19 U259.20 U259.21 U259.24 U259.25 U259.27 U259.28 U259.30 U259.36 U259.37 U259.38 U259.39 U259.40 U259.41 U259.45 U259.46 U260.45 U260.46 U262.12 U263.6 U263.8 U264.15 U265.6 U268.9 U303.6 U303.8 U304.1 U304.8 U304.9 U304.10 U304.12

## Keep-outs
KeepOutLayer:
  the board outline again, w12

## Silkscreen, mask and mechanical layers (free items; w line width, h text height)
Mechanical1:
  text "+" at 4825,7750 h300
  text "+" at 1075,5950 h300
  text "+" at 3900,3300 h45